# Altium PCB CP2102_USB_To_UART.PcbDoc
Units mil, origin at the board's own origin, x right, y up, seen from the top; angles counter-clockwise.
Board outline 1500 x 625 mil, 2 copper layers (Top Layer, Bottom Layer), stack 61.8 mil thick; 12 components, 7 nets, 58 pads, 35 vias.
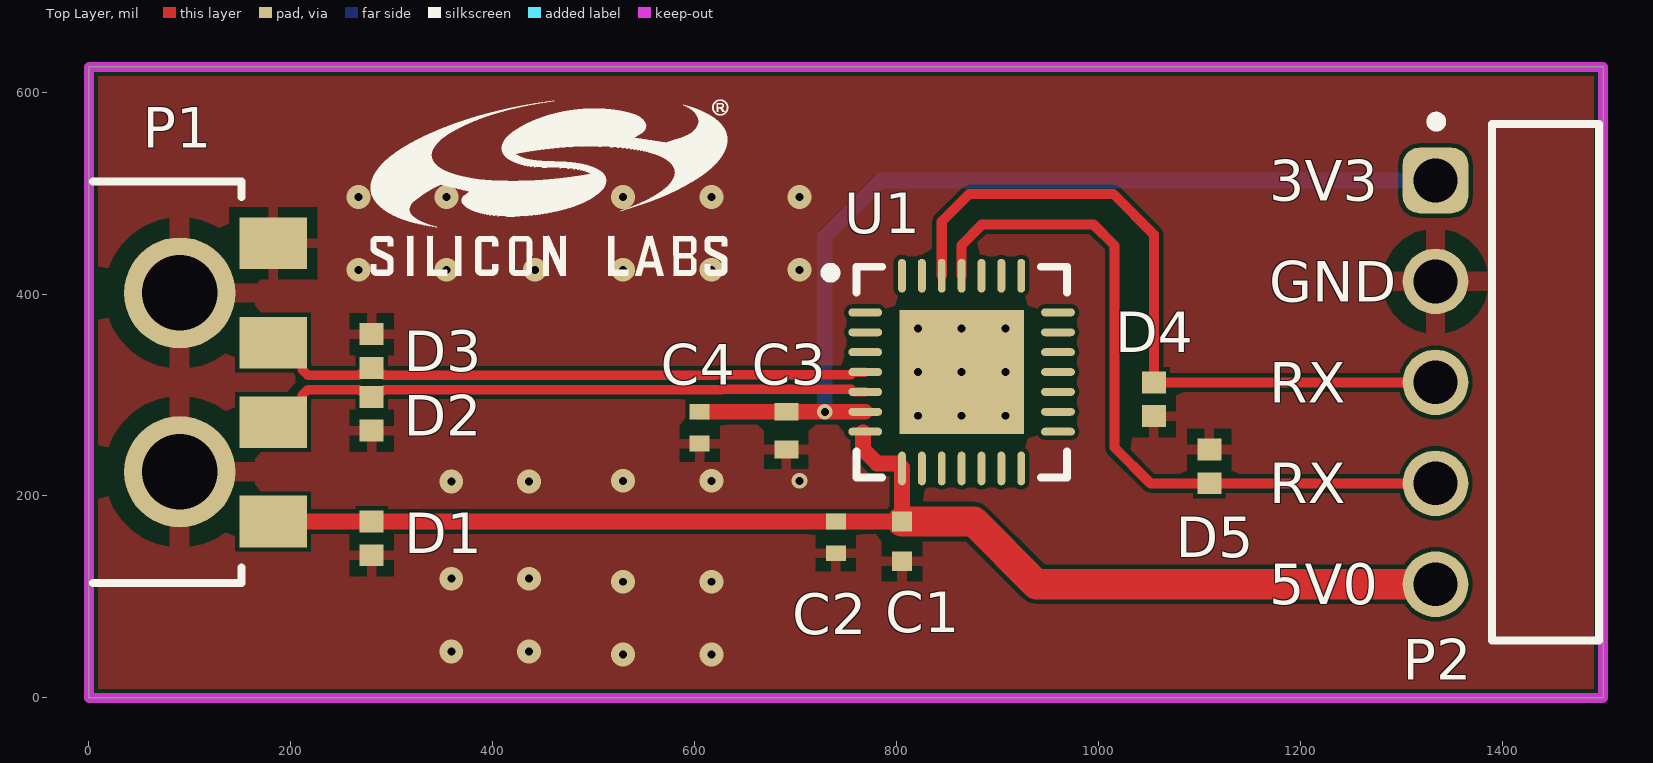
[diagram p0: Top Layer view]
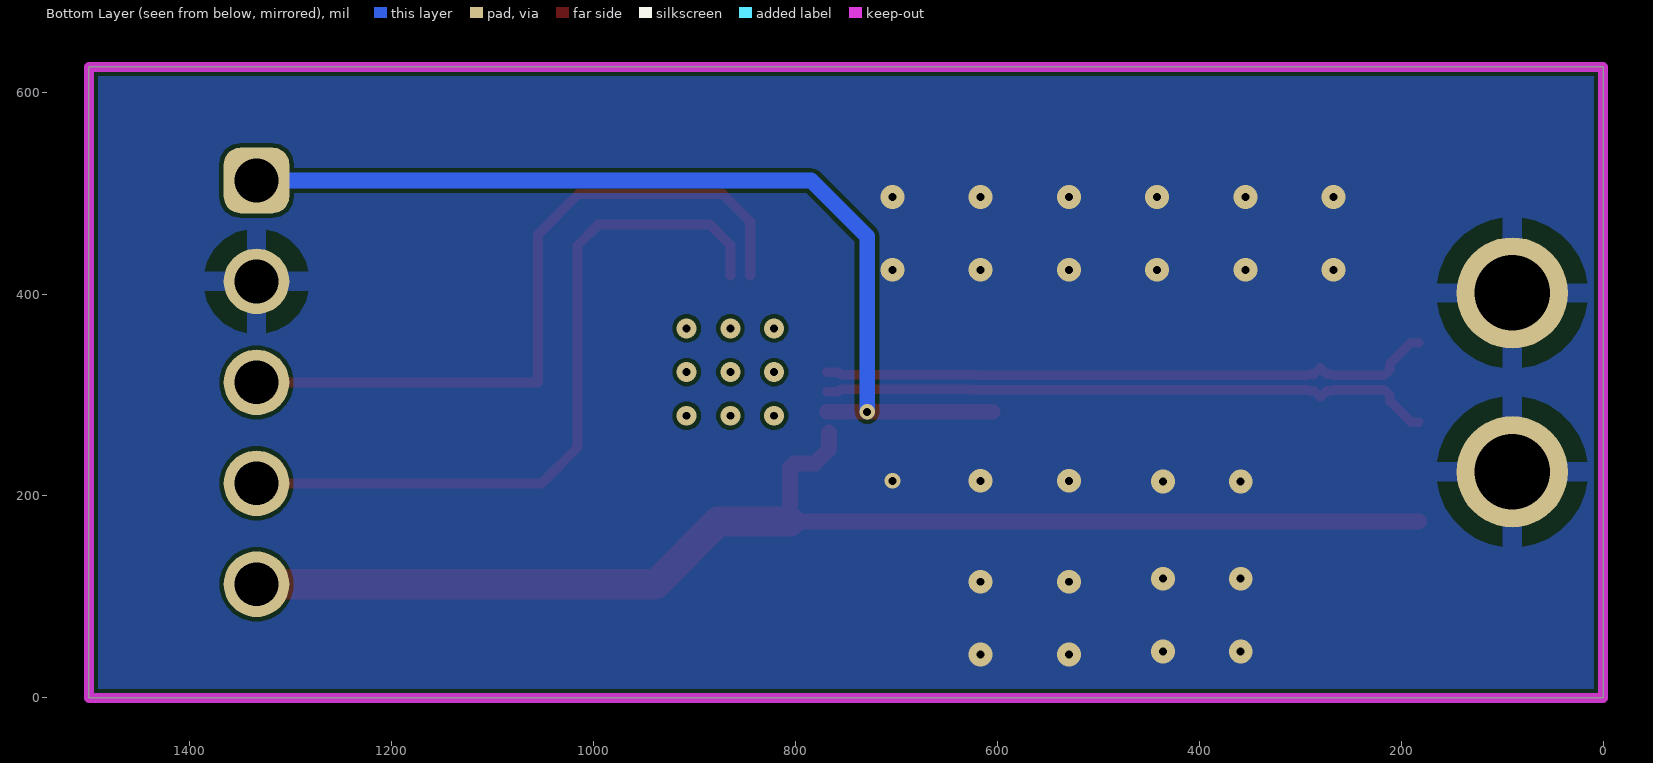
[diagram p1: Bottom Layer view, seen from below]
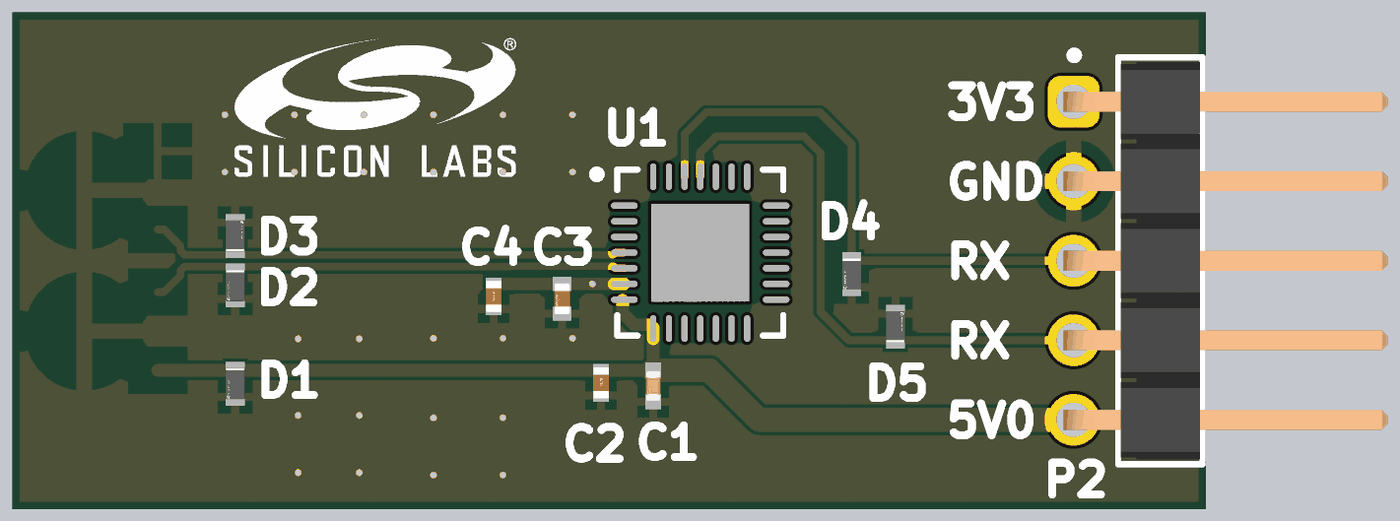
[diagram p2: 3D render of the assembled board from above, using the file's embedded part models]

## Layer stack, top to bottom
Top Solder: solder mask 0.4, Solder Resist, Dk 3.5
Top Layer: signal copper 1.4
Dielectric 1: dielectric 59, FR-4, Dk 4.8
Bottom Layer: signal copper 1.4
Bottom Solder: solder mask 0.4, Solder Resist, Dk 3.5

## Board outline
0,0 0,625 1500,625 1500,0

## Design rules (kind name [scope] priority, off if disabled: settings)
Clearance [All] p1: gap=4 ignorepadtopadclearanceinfootprint=FALSE
DiffPairsRouting [InDifferentialPair('DATA')] p1: maxlimit=5 minlimit=5 mostfreqgap=5 toplayer_minwidth=9.44 toplayer_maxwidth=9.44 toplayer_prefwidth=9.44 bottomlayer_minwidth=9.44 bottomlayer_maxwidth=9.44 bottomlayer_prefwidth=9.44 impedanceprofiledriven=TRUE impedanceprofileid={2F846C86-5015-462F-A125-9826741A1A81} impedanceprofilevalue=90.000000 maxuncoupledlength=500
MinimumSolderMaskSliver [All] p1: minsoldermaskwidth=3.5
PolygonConnect [All] p1: thpad.connectstyle=Relief thpad.reliefconductorwidth=19.68 thpad.reliefentries=4 thpad.polygonreliefangle="90 Angle" thpad.airgapwidth=19.68 smdpad.connectstyle=Relief smdpad.reliefconductorwidth=10 smdpad.reliefentries=4 smdpad.polygonreliefangle="90 Angle" smdpad.airgapwidth=10 via.connectstyle=Direct via.reliefconductorwidth=10 via.reliefentries=4 via.polygonreliefangle="90 Angle" via.airgapwidth=10
RoutingVias [All] p1: holewidth=47.24 width=47.24 viastyle="Through Hole" minholewidth=7.87 minwidth=15.75 maxholewidth=31.5 maxwidth=39.37
SilkToSilkClearance SilkToSilkClearance_1 [All] p1: silktosilkclearance=10
SilkToSilkClearance [All] p2: silktosilkclearance=10
SolderMaskExpansion [All] p1: expansion=4 istentingtop=FALSE
Width [InNet('VBUS')] p1: maxlimit=47.24 minlimit=15.75 preferedwidth=19.68
26 further rules are at their usual default settings.

## Classes and differential pairs
differential pair DATA: +DATA_P -DATA_N

## Components (designator, comment, footprint, x,y, rotation, side; value= is the part's Value field where it differs from the comment)
C1 "CC0402KRX5R6BB105" FP-CC0402-MFG 805.47,155.02 r270 top value=1uF
C2 "C1005X7R1C104K050BC" FP-C1005-050-0_05-MFG 740,158.96 r270 top
C3 "GRM155R61A475MEAAD" FP-GRM155-0_15-MFG 691,264.65 r270 top
C4 "C1005X7R1C104K050BC" FP-C1005-050-0_05-MFG 605,267.6 r270 top
D1 "UCLAMP3601P.TNT" FP-SLP1006P2-MFG 280,157.97 r90 top
D2 "UCLAMP3601P.TNT" FP-SLP1006P2-MFG 280,281.4 r90 top
D3 "UCLAMP3601P.TNT" FP-SLP1006P2-MFG 280,343.6 r270 top
D4 "UCLAMP3601P.TNT" FP-SLP1006P2-MFG 1055,295.77 r90 top
D5 "UCLAMP3601P.TNT" FP-SLP1006P2-MFG 1110,229.23 r270 top
P1 "629004113921" 629004113921 -219.06,312.5 r270 top
P2 "61300511021" 61300511021 1443,312.5 r90 top
U1 "CP2102-GM" SLAB-QFN-28-3125x3125TP_N 864.53,322.72 r0 top

## Footprints (in the part's own frame and the unit in brackets; to place one, negate y for a bottom-side part, rotate by r counter-clockwise, add the part's x,y. Pads: shape width x height; smd on the part's side, far side on the other; paste and mask are expansions set on the pad)
61300511021 [mm] "Pin Header, pitch 2.54 mm, THT, Angled, single row, 5p"
  rrect50% 1.65x1.65 hole 1.1: 1(5.08,2.77)
  round 1.65 hole 1.1: 2(2.54,2.77) 3(0,2.77) 4(-2.54,2.77) 5(-5.08,2.77)
  silkscreen extent -6.5,-1.35 6.68,2.87, body extent -6.35,-7.27 6.35,3.09, height 2.58
629004113921 [mm] "USB 2.0 Plug Type A SMT with Clip"
  rect 1.3x1.7 smd: 1(3.5,10.2) 2(1,10.2) 3(-1,10.2) 4(-3.5,10.2)
  round 2.8 hole 1.9: Shell(-2.25,7.85) Shell(2.25,7.85)
  silkscreen extent -5.05,5.66 5.05,9.4, body extent -6,-9.4 6,10.4, height 2.25
FP-C1005-050-0_05-MFG [mm]
  rect 0.4x0.5 smd paste+0 mask+0: 1(-0.4,0) 2(0.4,0)
  body extent -0.7,-0.38 0.7,0.38, height 0.25
FP-CC0402-MFG [mm]
  rect 0.5x0.5 smd paste+0 mask+0: 1(-0.5,0) 2(0.5,0)
  body extent -0.87,-0.48 0.87,0.48, height 0.25
FP-GRM155-0_15-MFG [mm]
  rect 0.45x0.6 smd paste+0 mask+0: 1(-0.475,0) 2(0.475,0)
  body extent -0.8,-0.43 0.8,0.43, height 0.25
FP-SLP1006P2-MFG [mm]
  rect 0.55x0.6 smd paste+0 mask+0: 1(-0.425,0) 2(0.425,0)
  body extent -0.8,-0.45 0.8,0.45, height 0.25
SLAB-QFN-28-3125x3125TP_N [mm] "QFN, 28-Leads, Body 5x5mm, Pitch 0.5mm, Thermal Pad 3.13x3.13mm, IPC Medium Density"
  oval 0.85x0.2 smd: 1(-2.425,1.5) 2(-2.425,1) 3(-2.425,0.5) 4(-2.425,0) 5(-2.425,-0.5) 6(-2.425,-1) 7(-2.425,-1.5) 15(2.425,-1.5) 16(2.425,-1) 17(2.425,-0.5) 18(2.425,0) 19(2.425,0.5) 20(2.425,1) 21(2.425,1.5)
  oval 0.2x0.85 smd: 8(-1.5,-2.425) 9(-1,-2.425) 10(-0.5,-2.425) 11(0,-2.425) 12(0.5,-2.425) 13(1,-2.425) 14(1.5,-2.425) 22(1.5,2.425) 23(1,2.425) 24(0.5,2.425) 25(0,2.425) 26(-0.5,2.425) 27(-1,2.425) 28(-1.5,2.425)
  rect 3.13x3.13 smd: 29(0,0)
  silkscreen extent -3.42,-2.65 2.65,2.65, body extent -2.5,-2.5 2.5,2.5, height 1

## Part data
C1: library part CMP-03422-000489-1, "CAP CER 1UF 10V X5R 0402", Capacitance=1uF, Manufacturer=YAGEO, Package=CC0402, Temperature="-55°C to +125°C", Temperature Characteristic=X5R, Temperature Coefficient=30ppm/°C, Temperature Range High=+125°C, Temperature Range Low=-55°C, Tolerance=0.1, Voltage Rating="10 V", Automotive=No, Automotive Grade=NA, Category=Cap, ComponentLink2Description=Datasheet, ComponentLink2URL=http://www.yageo.com/documents/recent/UPY-GP_NP0_16V-to-50V_16.pdf, Device Class L1="Passive Components", Device Class L2=Capacitors, Device Class L3="Ceramic Capacitors", Digikey Description="CAP CER 1UF 10V X5R 0402", Footprint Url=http://www.yageo.com/exep/pages/download/literatures/UPY-C_GEN_24.pdf, Height=0.55mm, Ipc Land Pattern Name=CAPC10050X50, Lead Free=Yes, Manufacturer Part Number=CC0402KRX5R6BB105, Material=Ceramic, Mouser Description="Multilayer Ceramic Capacitors MLCC - SMD/SMT 1uF 10V X5R 10%", Octopart=https://octopart.com/cc0402krx5r6bb105-yageo-42244620, RoHS=TRUE
C2 C4: library part CMP-08246-004182-1, "Multilayer Ceramic Capacitors 100nF ±10% 16V X7R SMD 0402", Capacitance=100nF, Case Code (Imperial)=0402, Case Code (Metric)=1005, Dielectric=X7R, Dielectric Material=Ceramic, Max Operating Temperature=125°C, Min Operating Temperature=-55°C, Package Quantity=1, Tolerance=10%, Voltage=16V, Case/Package=0402, Construction=Flat, Depth=0.5mm, Height=0.5mm, Lead Free="Lead Free", Length=1mm, Mount="Surface Mount", Number of Pins=2, Packaging="Tape and Reel", Radiation Hardening=No, Resistor Type=Ceramic, RoHS Compliant=Yes, Series=C, Termination=SMD/SMT, Thickness=0.022inch, Voltage Rating=16V, Voltage Rating (DC)=16V, Weight=2.3E-05oz, Width=0.02inch
C3: library part CMP-06035-003573-1, "Chip Multilayer Ceramic Capacitors for General Purpose, 0402, 4.7uF, X5R, 15%, 20%, 10V", Capacitance=4.7uF, Case Code (Imperial)=0402, Case Code (Metric)=1005, Max Operating Temperature=85°C, Min Operating Temperature=-55°C, Tolerance=20%, Voltage Rating=10V, Case/Package=0402, Mount="Surface Mount", Packaging="Tape and Reel"
D1 D2 D3 D4 D5: library part CMP-56445-000005-1, "TVS DIODE 33VWM 60VC SLP1006P2", Case Code (Imperial)=0402, Case Code (Metric)=1006, Case/Package=SMD/SMT, Clamping Voltage=60V, Leakage Current=1uA, Max Breakdown Voltage=45V, Max Operating Temperature=125°C, Min Breakdown Voltage=36V, Min Operating Temperature=-40°C, Peak Pulse Current=2A, Peak Pulse Power=125W, Power Dissipation=170W, Power Line Protection=No, Resistor Type=Zener, Reverse Standoff Voltage=33V, Clamping Voltage-Max=60V, Depth=0.6mm, Diode Type=ZENER, Direction=Unidirectional, Element Configuration=Single, Lead Free="Lead Free", Length=1mm, Mount="Surface Mount", Number of Pins=2, Number of Unidirectional Channels=1, Packaging="Tape and Reel", Radiation Hardening=No, RoHS Compliant=Yes, Series="Automotive, AEC-Q100, uClamp®", Working Voltage=33V
P1: library part CMP-1502-03242-2, Contact Resistance=20mΩ, Current Rating=1.5A, Insulation Resistance=1GΩ, Max Operating Temperature=105°C, Min Operating Temperature=-40°C, Operating Supply Voltage=30V, Connector Type=USB, Contact Plating=Gold, Features=Shielded, Gender=Male, Lead Free="Lead Free", Length=18.8mm, Mount="Horizontal, Surface Mount", NexarPartId=19991169, Number of Contacts=4, Number of Pins=4, Orientation=Horizontal, REACH SVHC=Unknown, RoHS=Compliant, Termination=SMD/SMT, USB Standard="USB 2.0"
P2: library part CMP-1502-01067-3, Color=Black, Contact Resistance=20mΩ, Current Rating=3A, Operating Supply Voltage=250V, Connector Type="Male Pin", Contact Material=Copper, Contact Mating Length=5.9944mm, Contact Plating=Gold, Gender=Male, Lead Pitch=2.54mm, Mount="Through Hole", NexarPartId=32855525, Number of Contacts=5, Number of Pins=5, Number of Positions=5, Number of Rows=1, Packaging=Bulk, Pitch=2.54mm, REACH SVHC=Unknown, RoHS=Compliant, Termination=Solder
U1: library part CMP-0511-00012-1, "Single-Chip USB to UART Bridge, 1024 Bytes EEPROM, -40 to 85 degC, 28-pin QFN, Tube", Manufacturer="Silicon Labs", Code_IPC=J-STD-020C, Code_JEDEC=MO-220, ComponentLink1Description="Manufacturer URL", ComponentLink1URL=http://www.silabs.com/, ComponentLink2Description=Datasheet, ComponentLink2URL=http://www.silabs.com/Support%20Documents/TechnicalDocs/CP2102-9.pdf, ComponentLink3Description="Package Specification", ComponentLink3URL=http://www.silabs.com/Support%20Documents/TechnicalDocs/C8051T61x.pdf, DatasheetVersion="Rev. 1.5", EEPROM="1024 Bytes", Internal Oscillator=TRUE, Mounting Technology="Surface Mount", PackageDescription="28-Pin Quad-Flat No-Leads Package, Body 5 x 5 mm, Pitch 0.5 mm", PackageReference=QFN-28, PartNumber=CP2102-GM, Sub-Family="USB Bridges"

## Via types
v1: diameter 23.62, hole 7.87, Top Layer to Bottom Layer, tented both sides, 24 vias
v2: diameter 19.68, hole 7.87, Top Layer to Bottom Layer, 9 vias
v3: diameter 15.75, hole 7.87, Top Layer to Bottom Layer, tented both sides, 2 vias

## Nets (pads, with @x,y where several pads share a name; then routed paths per layer and width w, separated by ;. In a path a pad name is that pad's centre, name@x,y a point inside that pad or via, vN(x,y) a via of type N, cw(c..) or ccw(c..) an arc to the next point about the centre after c; other vN are vias at no path point)
DATA_N: D2.2 P1.2 U1.5 | length 610.4
  Top Layer w9.44: P1.2 190.39,273.13 211.27,294 211.27,299.75 216.79,305.28 267.38,305.28 268.42,304.24 273.89,304.24 D2.2 286.11,304.24 291.58,304.24 292.62,305.28 626.7,305.28 627.08,305.66 730.34,305.66 755.2,305.66 757.82,303.03 U1.5
DATA_P: D3.2 P1.3 U1.4 | length 610.4
  Top Layer w9.44: P1.3 190.39,351.87 211.27,331 211.27,325.25 216.79,319.72 267.38,319.72 268.42,320.76 273.89,320.76 D3.2 286.11,320.76 291.58,320.76 292.62,319.72 620.02,319.72 620.4,320.09 736.32,320.09 755.2,320.09 757.82,322.72 U1.4
DATA_RX: D5.2 P2.4 U1.25 | length 731.6
  Top Layer w10: U1.25 864.53,448.53 885,469 995,469 1016,448 1016,248 1051.5,212.5 D5.2 P2.4
DATA_TX: D4.2 P2.3 U1.26 | length 717.1
  Top Layer w10: U1.26 844.84,471.84 872,499 1015,499 1055,459 D4.2 P2.3
GND: C1.2 C2.2 C3.2 C4.2 D1.1 D2.1 D3.1 D4.1 D5.1 P1.4 P1.Shell P2.2
  other v1: 529.2,43 616.6,43 359,46 436,46 529.2,115 616.6,115 359,118 436,118 359,214.33 436,214.33 529.2,215 616.6,215 267,424 354.4,424 441.8,424 529.2,424 616.6,424 704,424 267,496 354.4,496 441.8,496 529.2,496 616.6,496 704,496
  other v3: 704,215
VBUS: C1.1 C2.1 D1.2 P1.1 P2.5 U1.7 U1.8 | length 1293.5
  Top Layer w15.75: P1.1 D1.2 C2.1 C1.1 U1.8 805.47,228.23 801.54,232.17 780.83,232.17 767,246 U1.7@767,263
  Top Layer w30: C1.1 876.45,174.7 938.65,112.5 P2.5
VDD: C3.1 C4.1 P2.1 U1.6 | length 965.6
  Top Layer w15.75: C4.1 C3.1 v3(729,283.35) U1.6
  Bottom Layer w15.75: v3(729,283.35) 729,457 784.5,512.5 P2.1
pads on no net: U1.1 U1.2 U1.3 U1.9 U1.10 U1.11 U1.12 U1.13 U1.14 U1.15 U1.16 U1.17 U1.18 U1.19 U1.20 U1.21 U1.22 U1.23 U1.24 U1.27 U1.28 U1.29
copper on no net:
  other v2: 821.22,279.41 864.53,279.41 907.83,279.41 821.22,322.72 864.53,322.72 907.83,322.72 821.22,366.02 864.53,366.02 907.83,366.02

## Polygon pours and split planes (outlines as drawn)
GND on Top Layer "GND_L01_P000" (solid, remove dead copper, pour order 0): 0,0 0,625 1500,625 1500,0
GND on Bottom Layer "GND_L02_P002" (solid, pour order 2): 0,0 0,625 1500,625 1500,0

## Keep-outs
Keep-Out Layer:
  the board outline again, w10

## Silkscreen, mask and mechanical layers (free items; w line width, h text height)
Top Overlay:
  drawing of 19 lines, arcs and shapes, not listed
  text "3V3" at 1169.04,492.51 h40
  text "GND" at 1169.04,392.51 h40
  text "RX" at 1169.04,292.51 h40
  text "RX" at 1169.04,192.51 h40
  text "5V0" at 1169.04,92.51 h40

## Dimensions
0,657.47 to 1500,657.47 on Mechanical 1
1534,625 to 1534,0 on Mechanical 1

## Text inside footprints (layer, text, board x,y; h text height)
P1: Mechanical 2 "PCB Edge" at -39.92,391.24 h24 r270